# EAGLE board hw2 (EAGLE 7.5.0)
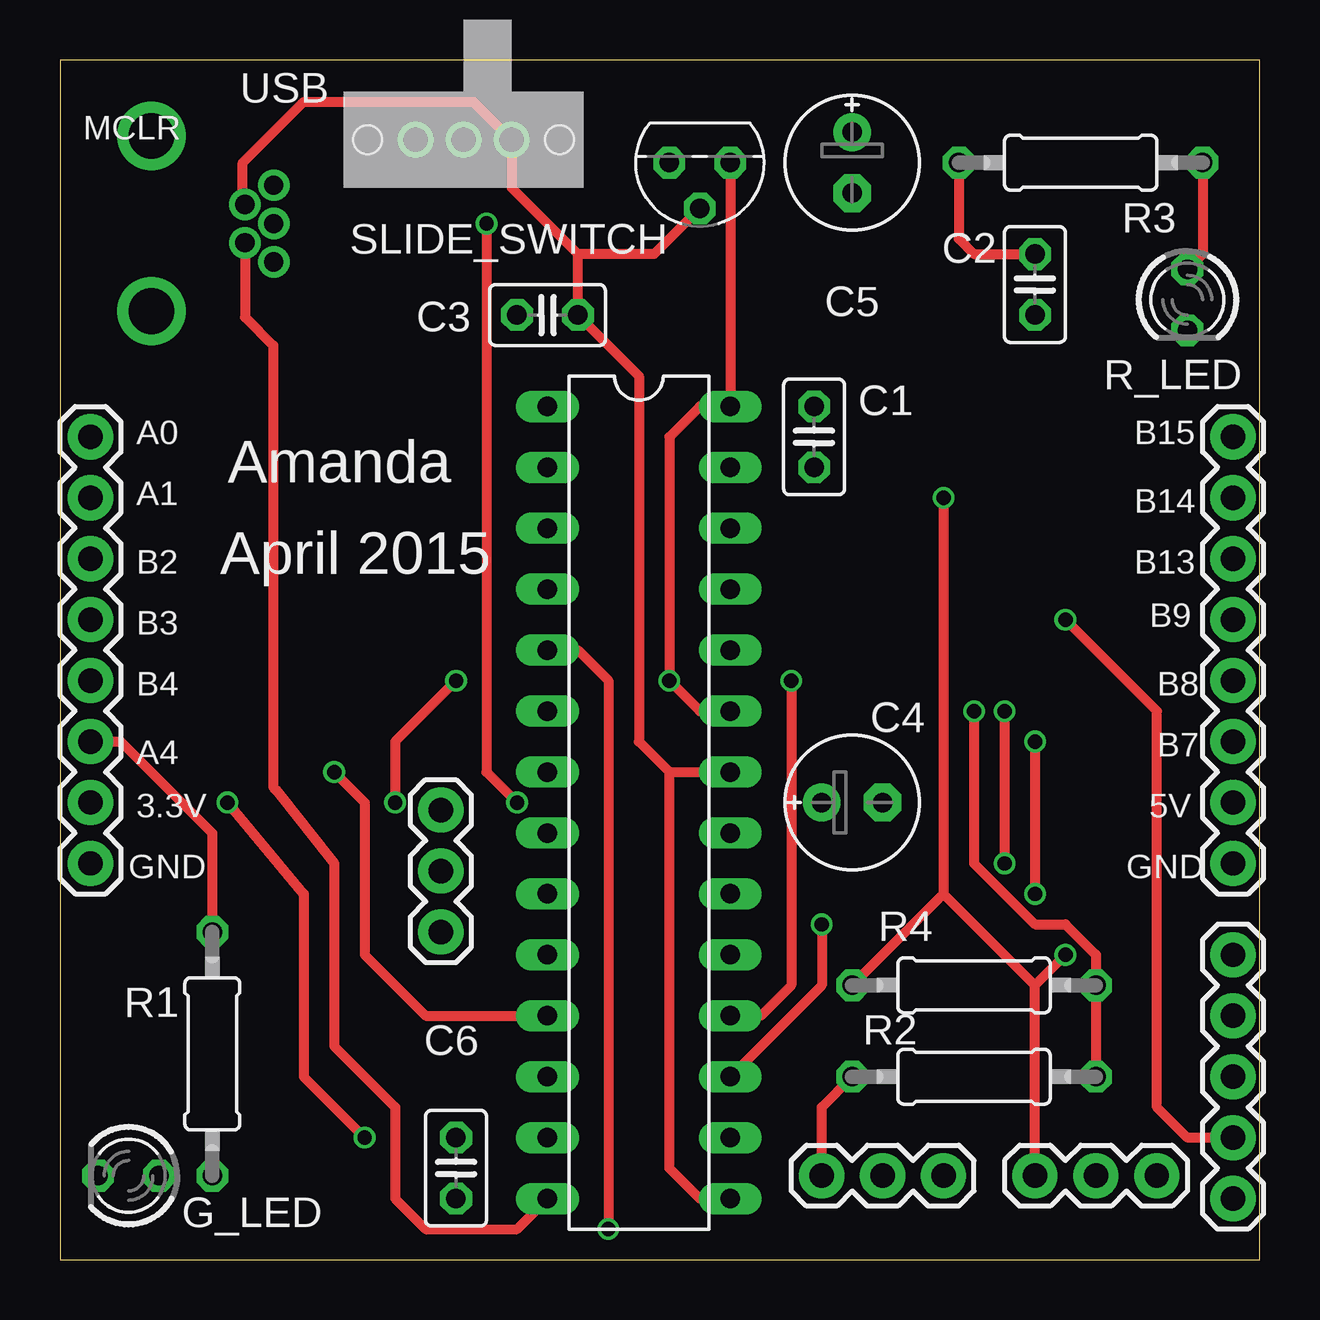
[diagram p0: board, top side]
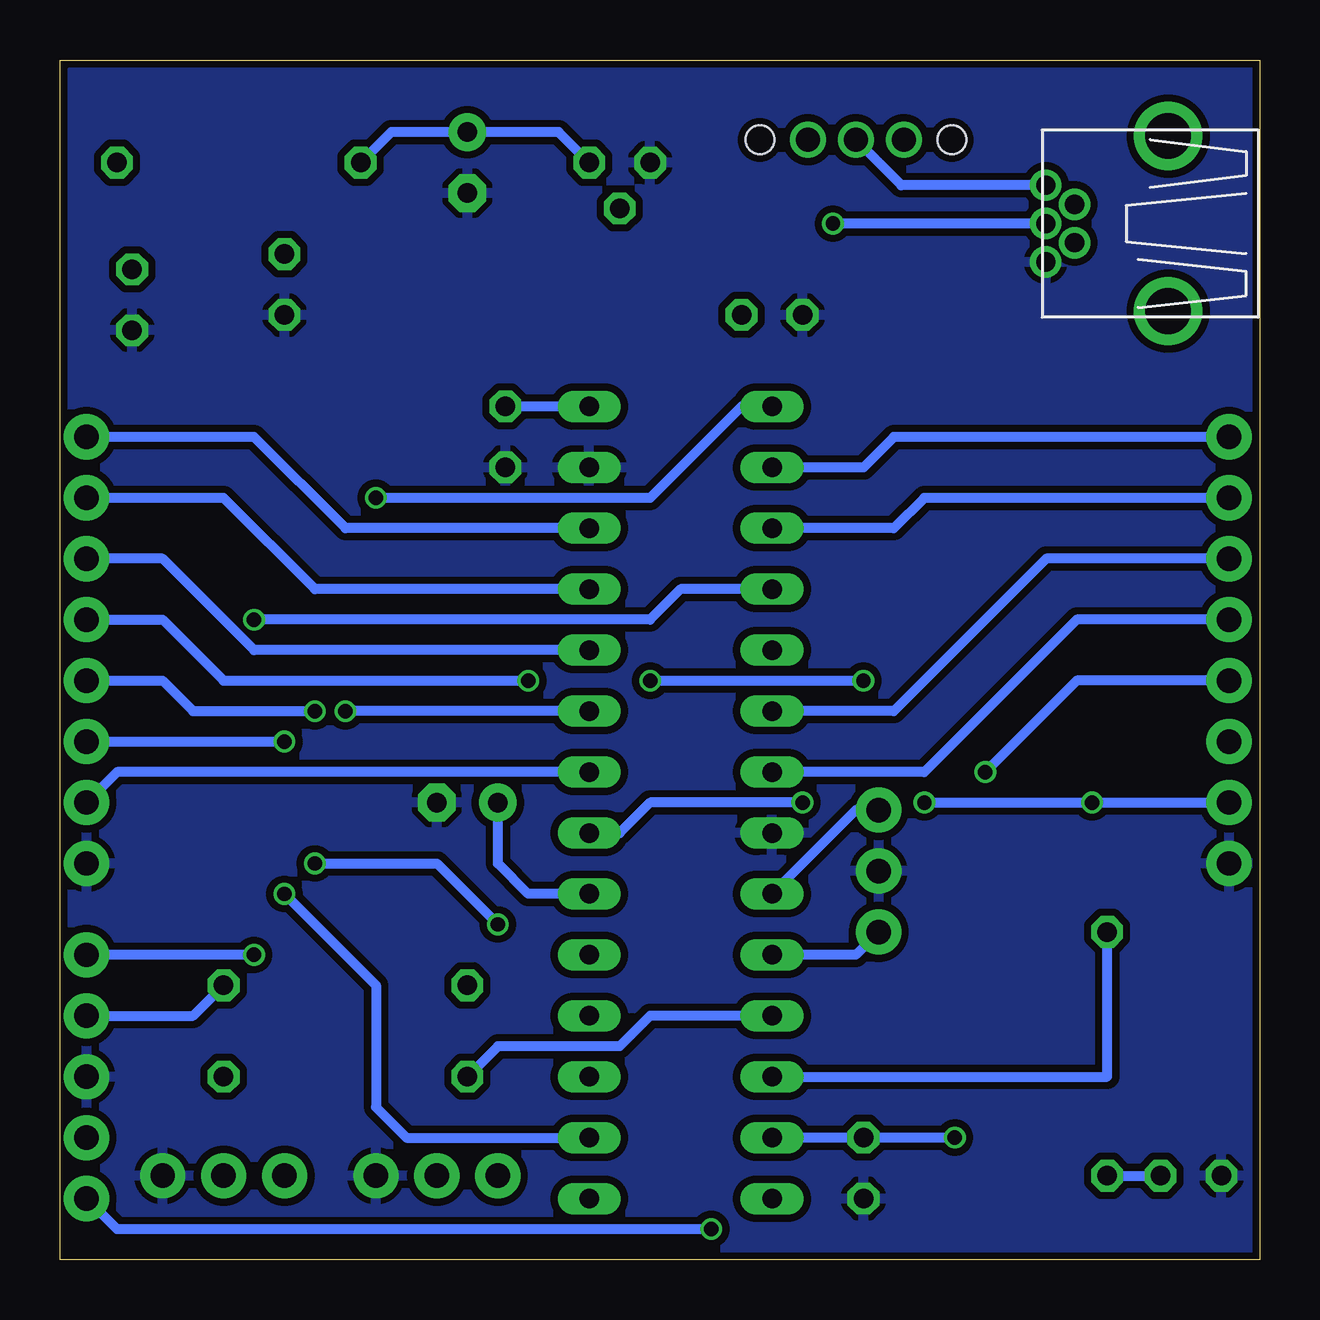
[diagram p1: board, bottom side, seen from below]

Size 50 x 50 mm. Coordinates in mm from the lower left corner, seen from the top.
Outline: 0,0 50,0 50,50 0,50 0,0
Copper layers (1*16): Top 0.035mm / dielectric 1.5mm / Bottom 0.035mm
Design rules "SeeedStudio_2layer_DRU_no_angle_20140221": minimum track width 6mil, minimum drill 12mil, track to track 6mil, track to pad 6mil, pad to pad 6mil, via to via 6mil, smd to smd 0mil, copper to edge 10mil, drill to drill 10mil, minimum pad ring 10mil, minimum via ring 6mil, stop-mask expansion 2mil, vias tented up to drill 100mil, thermal gap 10mil

## Footprints (pad centres in the part's own frame; a part is rotated, then mirrored left to right if it is on the bottom)
C025-025X050 = drill 0.813 octagon: 1 -1.27,0; 2 1.27,0
E2,5-6E = drill 0.813 pad 1.575: + -1.27,0 | drill 0.813 pad 1.575 octagon: - 1.27,0
LED3MM = drill 0.813 octagon: A -1.27,0; K 1.27,0
1X08_ROUND = drill 1.016 pad 1.88: 1 0,0; 2 2.54,0; 3 5.08,0; 4 7.62,0; 5 10.16,0; 6 12.7,0; 7 15.24,0; 8 17.78,0
0207/10 = drill 0.813 octagon: 1 -5.08,0; 2 5.08,0
TO92 = drill 0.813 octagon: 1 1.27,0; 2 0,1.905; 3 -1.27,0
DIL28-3 = drill 0.813 long: 1 -16.51,-3.81; 2 -13.97,-3.81; 3 -11.43,-3.81; 4 -8.89,-3.81; 5 -6.35,-3.81; 6 -3.81,-3.81; 7 -1.27,-3.81; 8 1.27,-3.81; 9 3.81,-3.81; 10 6.35,-3.81; 11 8.89,-3.81; 12 11.43,-3.81; 13 13.97,-3.81; 14 16.51,-3.81; 15 16.51,3.81; 16 13.97,3.81; 17 11.43,3.81; 18 8.89,3.81; 19 6.35,3.81; 20 3.81,3.81; 21 1.27,3.81; 22 -1.27,3.81; 23 -3.81,3.81; 24 -6.35,3.81; 25 -8.89,3.81; 26 -11.43,3.81; 27 -13.97,3.81; 28 -16.51,3.81
1X03 = drill 1.016 pad 1.88: 1 0,0; 2 2.54,0; 3 5.08,0
1X05 = drill 1.016 pad 1.88: 1 0,0; 2 2.54,0; 3 5.08,0; 4 7.62,0; 5 10.16,0
SLIDE_SWITCH = drill 1: P$1 -2,0; P$2 0,0; P$3 2,0 | hole 1.2: -4,0; 4,0
USB-MB-H = drill 0.8: D+ 5.1,0; D- 3.9,0.8; GND 5.1,-1.6; ID 3.9,-0.8; VBUS 5.1,1.6 | drill 1.9: P$6 0,-3.65; P$7 0,3.65

## Placement (x,y rotation side)
C1  0.1uF  [C025-025X050]  31.43,34.29 270 top
C2  1uF  [C025-025X050]  40.64,40.64 270 top
C3  1uF  [C025-025X050]  20.32,39.37 180 top
C4  10uF  [E2,5-6E]  33.02,19.05 0 top
C5  10uF  [E2,5-6E]  33.02,45.72 270 top
C6  0.1uF  [C025-025X050]  16.51,3.81 270 top
G_LED  [LED3MM]  2.86,3.49 180 top
M08_1  [1X08_ROUND]  1.27,16.51 90 top
M08_2  [1X08_ROUND]  48.9,16.51 90 top
R1  330  [0207/10]  6.35,8.57 270 top
R2  10k  [0207/10]  38.1,7.62 180 top
R3  330  [0207/10]  42.55,45.72 0 top
R4  10k  [0207/10]  38.1,11.43 0 top
R_LED  [LED3MM]  46.99,40.01 270 top
U$1  MCP1702  [TO92]  26.67,45.72 180 top
U$2  MX250F128B  [DIL28-3]  24.13,19.05 270 top
U$3  C_RES  [1X03]  15.88,13.65 90 top
U$4  USER  [1X03]  36.83,3.49 180 top
U$5  PICKIT3  [1X05]  48.9,12.7 270 top
U$6  SLIDE_SWITCH  [SLIDE_SWITCH]  16.83,46.67 180 top
U$7  RESET  [1X03]  40.64,3.49 0 top
USB  USB-MB-H  [USB-MB-H]  3.81,43.18 0 top

## Library data of the parts
C1-C6 R2 U$1-U$7 USB = hw2
G_LED R_LED = led
M08_1 M08_2 = hw2; PROD_ID: CONN-08437
R1 R3 R4 = resistor

## Nets
3.3V: C1.1 C2.1 C5.+ C6.1 M08_1.2 R2.1 R3.1 R4.2 U$1.3 U$2.13 U$2.23 U$2.28 U$5.2
5V: C3.1 M08_2.2 U$1.2 U$2.15 U$2.22 U$6.P$1 USB.D-
A0: M08_1.8 U$2.2
A1: M08_1.7 U$2.3
A4: M08_1.3 R1.1 U$2.12
B2: M08_1.6 U$2.6
B3: M08_1.5 U$2.7
B4: M08_1.4 R2.2 U$2.11 U$4.3
B7: M08_2.3 U$2.16
B8: M08_2.4 U$2.17
B9: M08_2.5 U$2.18
B13: M08_2.6 U$2.24
B14: M08_2.7 U$2.25
B15: M08_2.8 U$2.26
GND: C1.2 C2.2 C3.2 C4.- C5.- C6.2 G_LED.K M08_1.1 M08_2.1 R_LED.K U$1.1 U$2.8 U$2.27 U$3.2 U$4.1 U$5.3 U$7.3 USB.GND
N$1: U$6.P$2 USB.VBUS
N$2: G_LED.A R1.2
N$5: U$2.21 USB.D+
N$7: R3.2 R_LED.A
N$8: C4.+ U$2.20
N$10: U$2.4 U$5.4
N$11: U$2.5 U$5.5
OSC1: U$2.9 U$3.3
OSC2: U$2.10 U$3.1
RESET: R4.1 U$2.1 U$5.1 U$7.1
USBID: U$2.14 USB.ID

## Tracks (layer width: path | path; a pad name or v marks a point on that pad's centre or on a via)
3.3V  (via drill 0.6)
  Top 0.406: v12.7,5.08 10.16,7.62 10.16,15.24 v6.99,19.05 | U$1.3 U$2.28 26.67,35.56 25.4,34.29 v25.4,24.13 26.67,22.86 U$2.23 | R3.1 37.47,42.55 38.1,41.91 C2.1 | R2.1 R4.2 43.18,12.7 41.91,13.97 40.64,13.97 38.1,16.51 v38.1,22.86 | v16.51,24.13 13.97,21.59 v13.97,19.05
  Bottom 0.406: M08_1.2 v6.99,19.05 v13.97,19.05 | U$2.28 C1.1 | U$1.3 29.21,46.99 C5.+ 36.2,46.99 R3.1 | U$5.2 44.45,10.16 R4.2 | U$2.23 v38.1,22.86 | v25.4,24.13 v16.51,24.13 | v12.7,5.08 C6.1 U$2.13
5V
  Top 0.406: 21.59,41.91 18.83,44.67 U$6.P$1 17.24,48.26 10.16,48.26 7.62,45.72 7.62,44.45 7.71,44.36 USB.D- | 25.4,20.32 24.13,21.59 24.13,36.83 C3.1 21.59,41.91 | 25.4,20.32 U$2.22 | U$2.15 26.67,2.54 25.4,3.81 25.4,20.32 | U$1.2 24.77,41.91 21.59,41.91
  Bottom 0.406: U$2.22 47.62,20.32 M08_2.2
A0
  Bottom 0.406: M08_1.8 15.24,34.29 16.51,33.02 U$2.2
A1
  Bottom 0.406: M08_1.7 13.97,31.75 15.24,30.48 U$2.3
A4
  Top 0.406: M08_1.3 2.54,21.59 6.35,17.78 R1.1
  Bottom 0.406: U$2.12 6.35,7.62 R1.1
B2
  Bottom 0.406: M08_1.6 8.89,29.21 15.24,22.86 U$2.6
B3
  Bottom 0.406: M08_1.5 7.62,26.67 13.97,20.32 U$2.7
B4  (via drill 0.6)
  Top 0.406: U$2.11 15.24,10.16 12.7,12.7 12.7,19.05 v11.43,20.32 | U$4.3 31.75,6.35 R2.2
  Bottom 0.406: U$2.11 25.4,10.16 26.67,8.89 31.75,8.89 R2.2 | M08_1.4 7.62,24.13 v11.43,20.32
B7  (via drill 0.6)
  Top 0.406: v40.64,21.59 v40.64,15.24
  Bottom 0.406: M08_2.3 v40.64,21.59 | v40.64,15.24 36.83,11.43 36.83,6.35 35.56,5.08 U$2.16
B8  (via drill 0.6)
  Top 0.406: v39.37,22.86 v39.37,16.51 | v31.75,13.97 31.75,11.43 U$2.17
  Bottom 0.406: M08_2.4 45.72,24.13 44.45,22.86 v39.37,22.86 | v39.37,16.51 34.29,16.51 v31.75,13.97
B9  (via drill 0.6)
  Top 0.406: v30.48,24.13 30.48,11.43 29.21,10.16 U$2.18
  Bottom 0.406: M08_2.5 45.72,26.67 43.18,24.13 v30.48,24.13
B13
  Bottom 0.406: U$2.24 41.91,25.4 45.72,29.21 M08_2.6
B14
  Bottom 0.406: U$2.25 39.37,27.94 43.18,31.75 M08_2.7
B15
  Bottom 0.406: U$2.26 38.1,30.48 41.91,34.29 M08_2.8
GND
  pour Bottom (isolate 0.305): 0,49.53 0,0 49.53,0 49.53,49.53
N$1
  Bottom 0.406: USB.VBUS 14.94,44.78 U$6.P$2
N$2
  Bottom 0.406: R1.2 G_LED.A
N$5  (via drill 0.6)
  Top 0.406: v17.78,43.18 17.78,20.32 v19.05,19.05
  Bottom 0.406: USB.D+ v17.78,43.18 | v19.05,19.05 25.4,19.05 26.67,17.78 U$2.21
N$7
  Top 0.406: R3.2 47.62,41.91 R_LED.A
N$8
  Bottom 0.406: U$2.20 30.48,15.24 31.75,16.51 C4.+
N$10  (via drill 0.6)
  Top 0.406: U$5.4 46.99,5.08 45.72,6.35 45.72,22.86 v41.91,26.67
  Bottom 0.406: U$2.4 24.13,27.94 25.4,26.67 v41.91,26.67
N$11  (via drill 0.6)
  Top 0.406: U$2.5 21.59,25.4 22.86,24.13 v22.86,1.27
  Bottom 0.406: v22.86,1.27 47.62,1.27 U$5.5
OSC1
  Bottom 0.406: U$3.3 16.83,18.73 U$2.9
OSC2
  Bottom 0.406: U$3.1 16.83,12.7 U$2.10
RESET  (via drill 0.6)
  Top 0.406: U$7.1 40.64,11.43 | 40.64,11.43 v41.91,12.7 | v36.83,31.75 36.83,15.24 | 36.83,15.24 40.64,11.43 | R4.1 36.83,15.24
  Bottom 0.406: v41.91,12.7 U$5.1 | U$2.1 21.59,35.56 25.4,31.75 v36.83,31.75
USBID
  Top 0.406: USB.ID 7.71,39.28 8.89,38.1 8.89,19.68 8.98,19.59 11.43,16.51 11.43,8.89 13.97,6.35 13.97,2.54 15.24,1.27 19.05,1.27 U$2.14

## Text on the board
tPlace: MCLR | A0 | B15 | Amanda | A1 | B14 | B2 | April 2015 | B13 | B3 | B9 | B4 | B8 | A4 | B7 | 3.3V | 5V | GND | GND